# Altium PCB PCB_konvertora.PcbDoc
Units mm, origin at the board's own origin, x right, y up, seen from the top; angles counter-clockwise.
Board outline 152.4 x 101.6 mm, 2 copper layers (Top Layer, Bottom Layer); 2 components, 15 nets, 30 pads, 10 vias.
Unrouted connection lines stored in the file: 16.
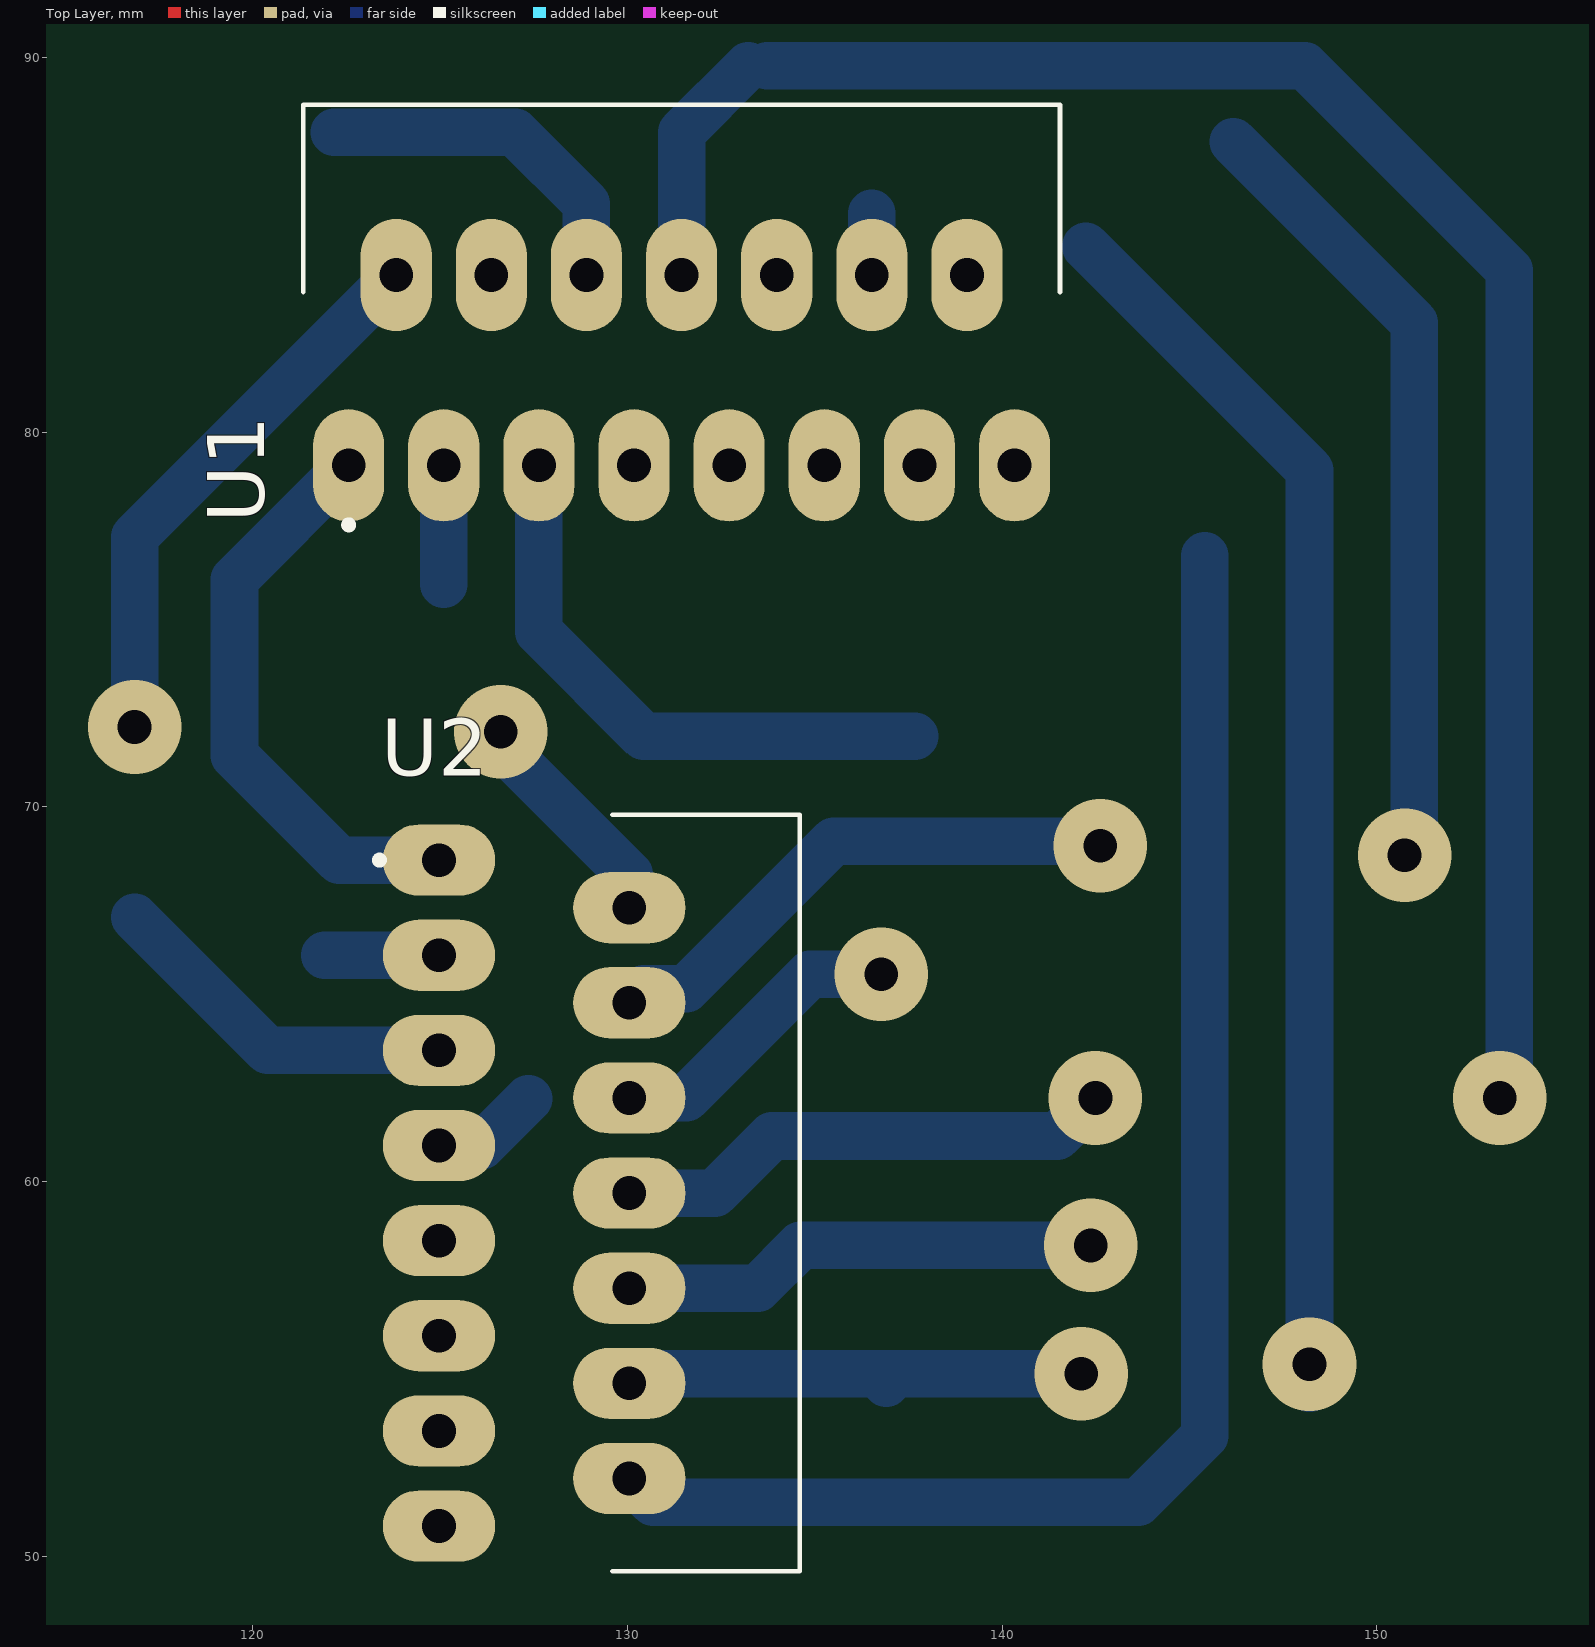
[diagram p0: Top Layer view]
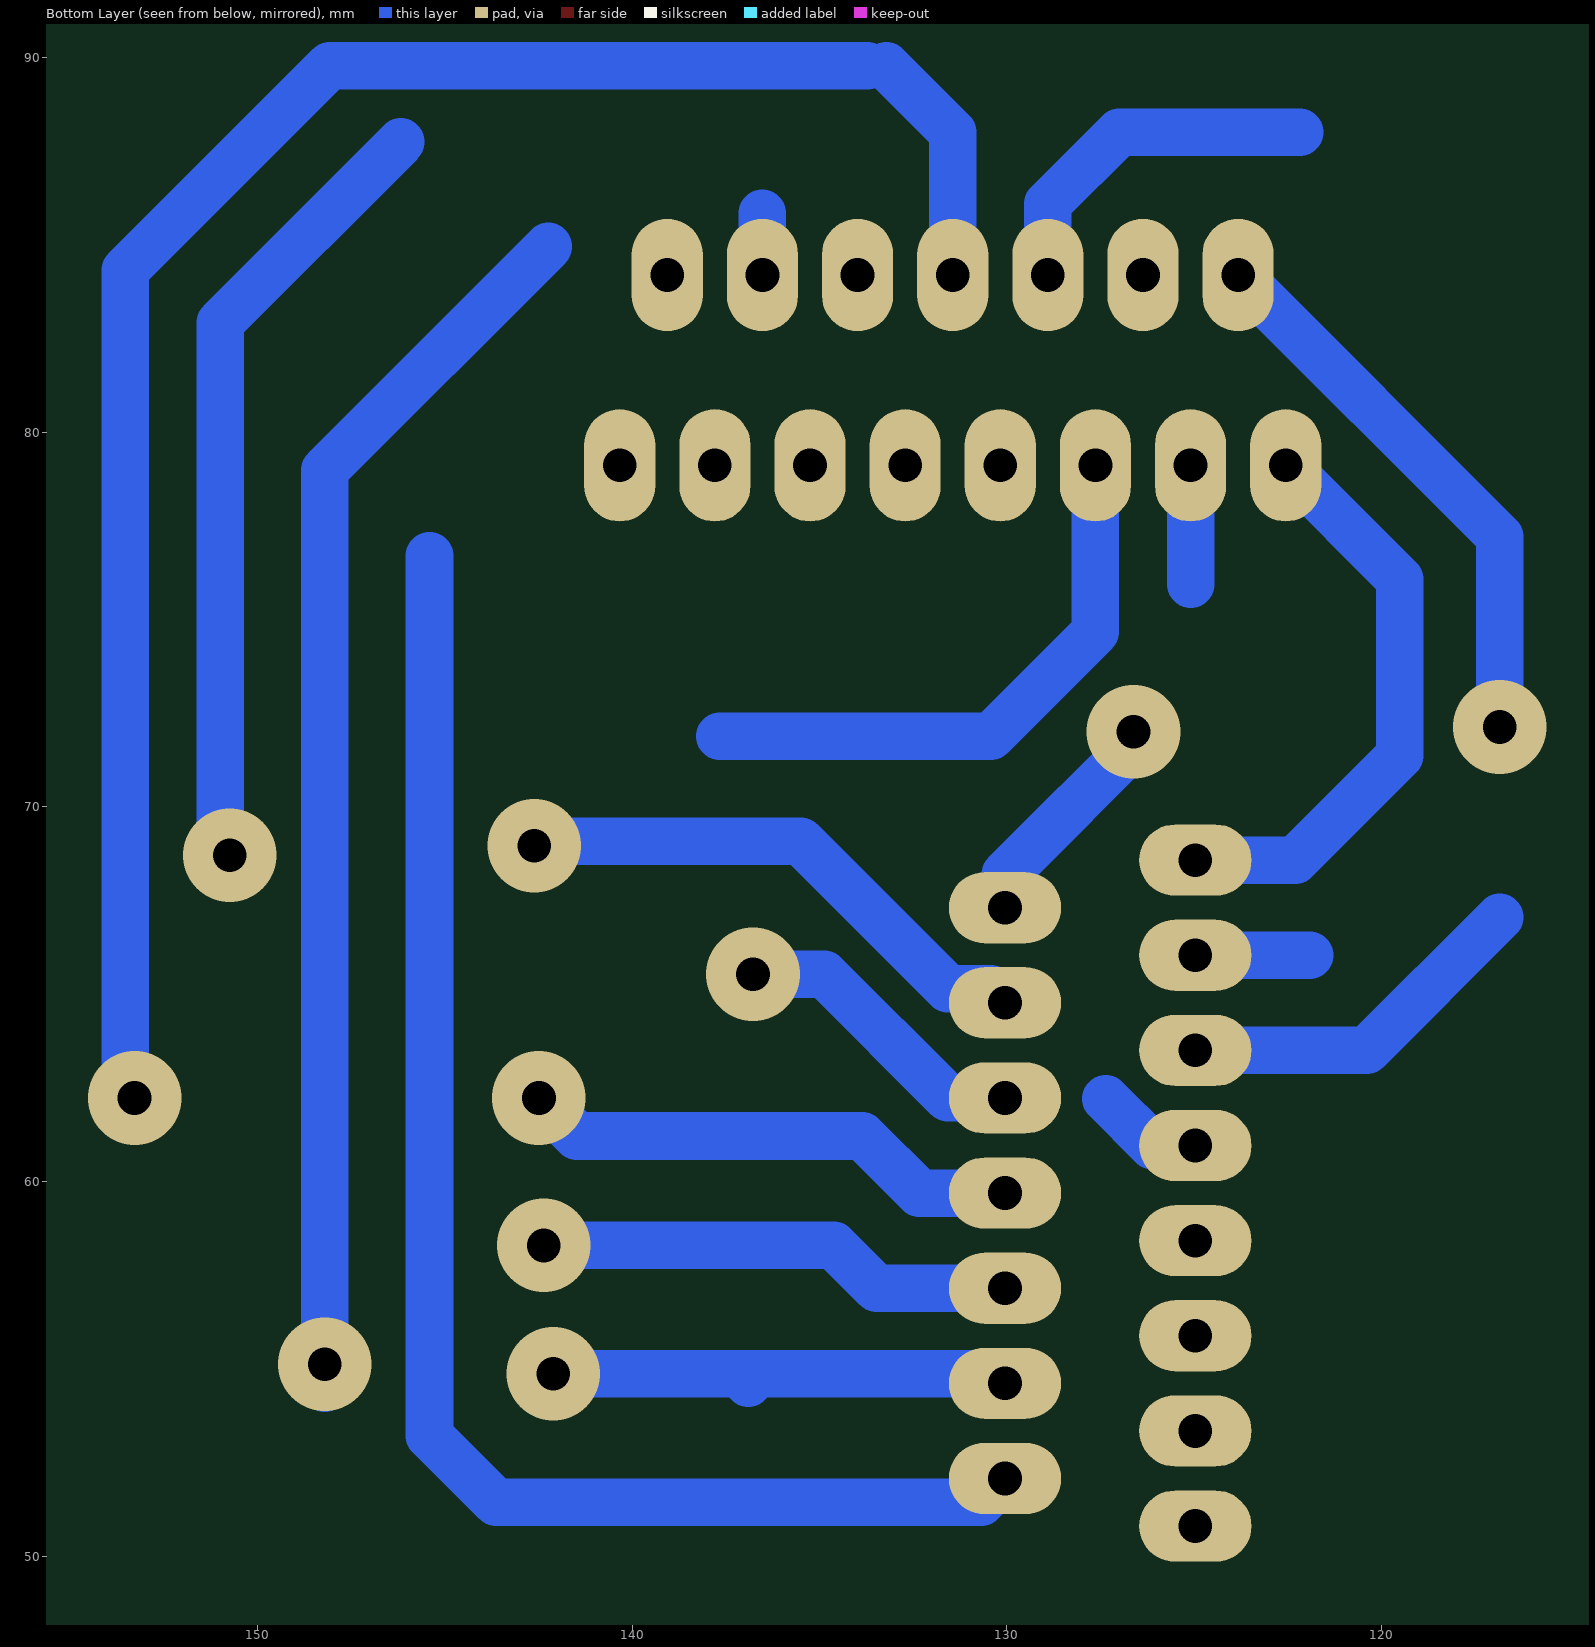
[diagram p1: Bottom Layer view, seen from below]

## Layer stack, top to bottom
Top Solder: solder mask 0.0102, Solder Resist, Dk 3.5
Top Layer: signal copper 0.0356
Dielectric 1: dielectric 0.32, FR-4, Dk 4.8
Bottom Layer: signal copper 0.0356
Bottom Solder: solder mask 0.0102, Solder Resist, Dk 3.5

## Board outline
25.4,25.4 177.8,25.4 177.8,127 25.4,127

## Design rules (kind name [scope] priority, off if disabled: settings)
Clearance [All] p1: gap=0.254 ignorepadtopadclearanceinfootprint=FALSE except(0: Arc-Hole Track-Hole SMDPad-Hole THPad-Hole Via-Hole Fill-Hole Poly-Hole Region-Hole Text-Hole)
PolygonConnect [All] p1: connectstyle=Relief reliefconductorwidth=0.254 reliefentries=4 polygonreliefangle="90 Angle" airgapwidth=0.254
RoutingVias [All] p1: holewidth=2 width=3.5 viastyle="Through Hole" minholewidth=2 minwidth=3.5 maxholewidth=2 maxwidth=3.5
SolderMaskExpansion [All] p1: expansion=0.102
Width [All] p1: maxlimit=1.27 minlimit=1.27 preferedwidth=1.27
30 further rules are at their usual default settings.

## Classes and differential pairs
component class Sheet1: U1

## Components (designator, comment, footprint, x,y, rotation, side; value= is the part's Value field where it differs from the comment)
U1 "L298N" l298n 122.555,79.121 r90 top
U2 "L298N" l298n 124.968,68.58 r0 top (schematic designator U1)

## Footprints (in the part's own frame and the unit in brackets; to place one, negate y for a bottom-side part, rotate by r counter-clockwise, add the part's x,y. Pads: shape width x height; smd on the part's side, far side on the other; paste and mask are expansions set on the pad)
l298n [mm]
  oval 3x1.9 hole 0.9: 1(0,0) 2(5.08,-1.27) 3(0,-2.54) 4(5.08,-3.81) 5(0,-5.08) 6(5.08,-6.35) 7(0,-7.62) 8(5.08,-8.89) 9(0,-10.16) 10(5.08,-11.43) 11(0,-12.7) 12(5.08,-13.97) 13(0,-15.24) 14(5.08,-16.51) 15(0,-17.78)
  silkscreen extent -1.69,-18.99 9.63,1.21

## Part data
U1 U2: "Dual Full Bridge Motor Driver 15-Pin(15+Tab) MULTIWATT V Tube", Package=None, Availability=Unavailable, MP=L298N, Price=None

## Via types
v1: diameter 2.5, hole 0.9, Top Layer to Bottom Layer, 10 vias

## Nets (pads, with @x,y where several pads share a name; then routed paths per layer and width w, separated by ;. In a path a pad name is that pad's centre, name@x,y a point inside that pad or via, vN(x,y) a via of type N, cw(c..) or ccw(c..) an arc to the next point about the centre after c; other vN are vias at no path point)
5v: U1.7 U2.7 | length 3.1
  Bottom Layer w1.27: U2.7 126.111,60.96 127.357,62.206 ; U1.7 U1.7@130.405,79.121
ena: U1.4 U2.10 | length 12.8
  Bottom Layer w1.27: U2.10 133.477,57.15 134.62,58.293 v1(142.367,58.293)
enb: U1.6 U2.5 | length 19
  Bottom Layer w1.27: 116.84,67.056 120.396,63.5 U2.5 ; 122.174,88.011 127,88.011 128.905,86.106 U1.6
gnd: U1.8 U2.8 | length 64.1
  Bottom Layer w1.27: U2.8@129.921,59.69 U2.8 132.334,59.69 133.858,61.214 141.478,61.214 v1(142.494,62.23) ; U1.8 131.445,88.011 133.223,89.789 ; 133.731,89.789 148.082,89.789 153.543,84.328 v1@153.543,62.23
  other v1: 153.289,62.23
in1: U1.11 U2.11
in2: U1.9 U2.9
in3: U1.5 U2.6 | length 23.7
  Bottom Layer w1.27: U1.5 127.635,74.676 130.429,71.882 137.668,71.882 ; U2.6 131.572,62.23 134.874,65.532 v1(136.779,65.532)
in4: U1.10 U2.4 | length 36.1
  Bottom Layer w1.27: U2.4 130.429,65.151 131.572,65.151 135.509,69.088 142.621,69.088 v1@142.875,68.834 ; 146.177,87.757 151.003,82.931 151.003,69.342 150.749,69.088 v1(150.749,68.707) v1@150.495,68.707
  other v1: 142.621,68.961
out1: U1.14 U2.14 | length 39.9
  Bottom Layer w1.27: U2.14 130.683,51.435 143.637,51.435 145.415,53.213 145.415,76.708
out2: U1.13 U2.13
out3: U1.3 U2.3 | length 6.2
  Bottom Layer w1.27: 121.92,66.04 U2.3 ; 125.095,75.946 U1.3
out4: U1.2 U2.2 | length 22.3
  Bottom Layer w1.27: v1(116.84,72.136) 116.84,77.216 U1.2 ; v1(126.619,72.009) 126.238,72.009 130.048,68.199 U2.2 U2.2@130.683,67.31
rsena: U1.15 U2.15
rsenb: U1.1 U2.1 | length 15.6
  Bottom Layer w1.27: U1.1 119.507,76.073 119.507,71.374 122.301,68.58 U2.1
vcc: U1.12 U2.12 | length 47.1
  Bottom Layer w1.27: U2.12 130.302,54.864 137.16,54.864 ; U1.12 136.525,85.852 ; 136.906,54.61 137.16,54.864 ; v1(142.113,54.864) 137.16,54.864 ; 142.24,84.963 148.209,78.994 v1(148.209,55.118) v1@148.209,54.483